# EAGLE board CT_schematic (EAGLE 7.6.0)

Size 100 x 80 mm. Coordinates in mm from the lower left corner, seen from the top.
Outline: 0,0 100,0 100,80 0,80 0,0
Copper layers (1*16): Top 0.035mm / dielectric 1.5mm / Bottom 0.035mm
Design rules "default": minimum track width 10mil, minimum drill 24mil, track to track 8mil, track to pad 8mil, pad to pad 8mil, via to via 8mil, smd to smd 8mil, copper to edge 40mil, drill to drill 8mil, minimum pad ring 10mil, minimum via ring 8mil, stop-mask expansion 4mil, vias tented up to drill 0mil, thermal gap 10mil

## Footprints (pad centres in the part's own frame; a part is rotated, then mirrored left to right if it is on the bottom)
C0603 = smd 0.8 x 0.8: 1 -0.762,0; 2 0.762,0
C0402 = smd 0.5 x 0.5: 1 -0.508,0; 2 0.508,0
C1210 = smd 1.2 x 2.5: 1 -1.524,0; 2 1.524,0
C0805 = smd 1.2 x 1.3: 1 -1.016,0; 2 1.016,0
R0603 = smd 0.8 x 0.8: 1 -0.762,0; 2 0.762,0
EXV-9H = smd 3.505 x 1.676: 1 -2.857,0; 2 2.857,0
L0603 = smd 0.8 x 0.8: 1 -0.762,0; 2 0.762,0
IND25X25CZ = smd 2.489 x 3.429: 1 -2.718,0; 2 2.718,0
PJ-037B_PACKAGE = drill 3.7 square: 1 12,0 | drill 3.2 square: 2 6,0
LQFP144 = smd 0.35 x 1.35: 1 -8.75,-10.625; 2 -8.25,-10.625; 3 -7.75,-10.625; 4 -7.25,-10.625; 5 -6.75,-10.625; 6 -6.25,-10.625; 7 -5.75,-10.625; 8 -5.25,-10.625; 9 -4.75,-10.625; 10 -4.25,-10.625; 11 -3.75,-10.625; 12 -3.25,-10.625; 13 -2.75,-10.62; 14 -2.25,-10.625; 15 -1.75,-10.625; 16 -1.25,-10.625; 17 -0.75,-10.625; 18 -0.25,-10.625; 19 0.25,-10.625; 20 0.75,-10.625; 21 1.25,-10.625; 22 1.75,-10.625; 23 2.25,-10.625; 24 2.75,-10.62; 25 3.25,-10.625; 26 3.75,-10.625; 27 4.25,-10.625; 28 4.75,-10.625; 29 5.25,-10.625; 30 5.75,-10.625; 31 6.25,-10.625; 32 6.75,-10.625; 33 7.25,-10.625; 34 7.75,-10.625; 35 8.25,-10.625; 36 8.75,-10.625; 73 8.75,10.625; 74 8.25,10.625; 75 7.75,10.625; 76 7.25,10.625; 77 6.75,10.625; 78 6.25,10.625; 79 5.75,10.625; 80 5.25,10.625; 81 4.75,10.625; 82 4.25,10.625; 83 3.75,10.625; 84 3.25,10.625; 85 2.75,10.625; 86 2.25,10.625; 87 1.75,10.625; 88 1.25,10.625; 89 0.75,10.625; 90 0.25,10.625; 91 -0.25,10.625; 92 -0.75,10.625; 93 -1.25,10.625; 94 -1.75,10.625; 95 -2.25,10.625; 96 -2.75,10.625; 97 -3.25,10.625; 98 -3.75,10.625; 99 -4.25,10.625; 100 -4.75,10.625; 101 -5.25,10.625; 102 -5.75,10.625; 103 -6.25,10.625; 104 -6.75,10.625; 105 -7.25,10.625; 106 -7.75,10.625; 107 -8.25,10.625; 108 -8.75,10.625 | smd 1.35 x 0.35: 37 10.625,-8.75; 38 10.625,-8.25; 39 10.625,-7.75; 40 10.625,-7.25; 41 10.625,-6.75; 42 10.625,-6.25; 43 10.625,-5.75; 44 10.625,-5.25; 45 10.625,-4.75; 46 10.625,-4.25; 47 10.625,-3.75; 48 10.625,-3.25; 49 10.625,-2.75; 50 10.625,-2.25; 51 10.625,-1.75; 52 10.625,-1.25; 53 10.625,-0.75; 54 10.625,-0.25; 55 10.625,0.25; 56 10.625,0.75; 57 10.625,1.25; 58 10.625,1.75; 59 10.625,2.25; 60 10.625,2.75; 61 10.625,3.25; 62 10.625,3.75; 63 10.625,4.25; 64 10.625,4.75; 65 10.625,5.25; 66 10.625,5.75; 67 10.625,6.25; 68 10.625,6.75; 69 10.625,7.25; 70 10.625,7.75; 71 10.625,8.25; 72 10.625,8.75; 109 -10.625,8.75; 110 -10.625,8.25; 111 -10.625,7.75; 112 -10.625,7.25; 113 -10.625,6.75; 114 -10.625,6.25; 115 -10.625,5.75; 116 -10.625,5.25; 117 -10.625,4.75; 118 -10.625,4.25; 119 -10.625,3.75; 120 -10.625,3.25; 121 -10.625,2.75; 122 -10.625,2.25; 123 -10.625,1.75; 124 -10.625,1.25; 125 -10.625,0.75; 126 -10.625,0.25; 127 -10.625,-0.25; 128 -10.625,-0.75; 129 -10.625,-1.25; 130 -10.625,-1.75; 131 -10.625,-2.25; 132 -10.625,-2.75; 133 -10.625,-3.25; 134 -10.625,-3.75; 135 -10.625,-4.25; 136 -10.625,-4.75; 137 -10.625,-5.25; 138 -10.625,-5.75; 139 -10.625,-6.25; 140 -10.625,-6.75; 141 -10.625,-7.25; 142 -10.625,-7.75; 143 -10.625,-8.25; 144 -10.625,-8.75
LBGA-64 = smd 0.559 x 0.559: A1 -3.5,3.5; A2 -2.5,3.5; A3 -1.5,3.5; A4 -0.5,3.5; A5 0.5,3.5; A6 1.5,3.5; A7 2.5,3.5; A8 3.5,3.5; B1 -3.5,2.5; B2 -2.5,2.5; B3 -1.5,2.5; B4 -0.5,2.5; B5 0.5,2.5; B6 1.5,2.5; B7 2.5,2.5; B8 3.5,2.5; C1 -3.5,1.5; C2 -2.5,1.5; C3 -1.5,1.5; C4 -0.5,1.5; C5 0.5,1.5; C6 1.5,1.5; C7 2.5,1.5; C8 3.5,1.5; D1 -3.5,0.5; D2 -2.5,0.5; D3 -1.5,0.5; D4 -0.5,0.5; D5 0.5,0.5; D6 1.5,0.5; D7 2.5,0.5; D8 3.5,0.5; E1 -3.5,-0.5; E2 -2.5,-0.5; E3 -1.5,-0.5; E4 -0.5,-0.5; E5 0.5,-0.5; E6 1.5,-0.5; E7 2.5,-0.5; E8 3.5,-0.5; F1 -3.5,-1.5; F2 -2.5,-1.5; F3 -1.5,-1.5; F4 -0.5,-1.5; F5 0.5,-1.5; F6 1.5,-1.5; F7 2.5,-1.5; F8 3.5,-1.5; G1 -3.5,-2.5; G2 -2.5,-2.5; G3 -1.5,-2.5; G4 -0.5,-2.5; G5 0.5,-2.5; G6 1.5,-2.5; G7 2.5,-2.5; G8 3.5,-2.5; H1 -3.5,-3.5; H2 -2.5,-3.5; H3 -1.5,-3.5; H4 -0.5,-3.5; H5 0.5,-3.5; H6 1.5,-3.5; H7 2.5,-3.5; H8 3.5,-3.5
QFN-32 = smd 0.6 x 0.3: 1 -2.3,1.75; 2 -2.3,1.25; 3 -2.3,0.75; 4 -2.3,0.25; 5 -2.3,-0.25; 6 -2.3,-0.75; 7 -2.3,-1.25; 8 -2.3,-1.75; 17 2.3,-1.75; 18 2.3,-1.25; 19 2.3,-0.75; 20 2.3,-0.25; 21 2.3,0.25; 22 2.3,0.75; 23 2.3,1.25; 24 2.3,1.75 | smd 0.3 x 0.6: 9 -1.75,-2.3; 10 -1.25,-2.3; 11 -0.75,-2.3; 12 -0.25,-2.3; 13 0.25,-2.3; 14 0.75,-2.3; 15 1.25,-2.3; 16 1.75,-2.3; 25 1.75,2.3; 26 1.25,2.3; 27 0.75,2.3; 28 0.25,2.3; 29 -0.25,2.3; 30 -0.75,2.3; 31 -1.25,2.3; 32 -1.75,2.3 | smd 3.2 x 3.2: EXP 0,0
SJ-43515TS-SMT-TR = smd 2.2 x 3: 1 0.6,-7.4; 4 3.4,-7.4 | smd 3 x 3: 2 12.8,-7.4; 5 17,-3 | smd 2 x 3: 3 5.3,0; 6 2.5,0 | drill 1.8: P$7 4.5,-3.69; P$8 11.54,-3.69
WM-64PC = drill 0.6 pad 1: 1 -1,0.95; 2 -1,-0.95
SSOP-28 = smd 1.5 x 0.4: 1 -3.625,4.225; 2 -3.625,3.575; 3 -3.625,2.925; 4 -3.625,2.275; 5 -3.625,1.625; 6 -3.625,0.975; 7 -3.625,0.325; 8 -3.625,-0.325; 9 -3.625,-0.975; 10 -3.625,-1.625; 11 -3.625,-2.275; 12 -3.625,-2.925; 13 -3.625,-3.575; 14 -3.625,-4.225; 15 3.625,-4.225; 16 3.625,-3.575; 17 3.625,-2.925; 18 3.625,-2.275; 19 3.625,-1.625; 20 3.625,-0.975; 21 3.625,-0.325; 22 3.625,0.325; 23 3.625,0.975; 24 3.625,1.625; 25 3.625,2.275; 26 3.625,2.925; 27 3.625,3.575; 28 3.625,4.225
HTSS-105-01-G-D = drill 1 pad 1.8 square: 1 0,0 | drill 1 pad 1.8: 2 0,2.54; 3 2.54,0; 4 2.54,2.54; 5 5.08,0; 6 5.08,2.54; 7 7.62,0; 8 7.62,2.54; 9 10.16,0; 10 10.16,2.54
ASEK = smd 1.4 x 1: 1 -1.1,-0.8; 2 1.1,-0.8; 3 1.1,0.8; 4 -1.1,0.8
ASFL1 = smd 1.7 x 1.5: 1 -1.27,-1.1; 2 1.27,-1.1; 3 1.27,1.1; 4 -1.27,1.1
WSON-8 = smd 0.3 x 0.6: 1 -0.75,0; 2 0.05,0; 3 0.85,0; 4 1.65,0; 5 1.65,3.8; 6 0.85,3.8; 7 0.05,3.8; 8 -0.75,3.8 | smd 3 x 2.6: PAD 0.45,1.9
IR3899MTR1PBF = smd 0.25 x 0.75: 1 0,0; 2 0.5,0; 3 1,0; 4 1.5,0; 5 2,0; 6 2.5,0; 7 3,0 | smd 0.75 x 0.25: 8 3.425,0.78; 9 3.425,1.28; 10 3.425,1.78; 14 -0.425,1.78; 15 -0.425,1.28; 16 -0.425,0.78 | smd 0.3 x 1.95: 11 3.22,3.63 | smd 1.62 x 2.42: 12 1.786,3.8 | smd 1 x 1.95: 13 0.117,3.63 | smd 2.19 x 1.25: 17 1.51,1.26
SON-6 = smd 0.55 x 0.3: 1 -0.355,0.5 | smd 0.52 x 0.3: 2 -0.37,0; 3 -0.37,-0.5; 4 0.37,-0.5; 5 0.37,0; 6 0.37,0.5
SW_4-1437565-2 = smd 1.4 x 2.1: 1 -2.23,4.55; 2 -2.23,-4.55; 3 2.23,4.55; 4 2.23,-4.55
LGM67K-G1J2-24-Z = smd 0.8 x 1.4: A -2,0; C 0,0
NC7SZ125M5X = smd 1.3 x 0.7: 1 -1.3,0.95; 2 -1.3,0; 3 -1.3,-0.95; 4 1.3,-0.95; 5 1.3,0.95

## Placement (x,y rotation side)
C1  1e-06  [C0603]  -67.31,77.47 0 top  (outside the outline)
C2  1e-07  [C0603]  -71.12,77.47 0 top  (outside the outline)
C3  1e-07  [C0603]  -74.93,77.47 0 top  (outside the outline)
C4  1e-07  [C0603]  -78.74,77.47 0 top  (outside the outline)
C5  1e-07  [C0603]  -82.55,77.47 0 top  (outside the outline)
C6  1e-07  [C0603]  -86.36,77.47 0 top  (outside the outline)
C7  1e-07  [C0603]  -15.24,82.55 0 top  (outside the outline)
C8  1e-07  [C0603]  -19.05,82.55 0 top  (outside the outline)
C9  1e-07  [C0603]  -22.86,82.55 0 top  (outside the outline)
C10  1e-07  [C0603]  -26.67,82.55 0 top  (outside the outline)
C11  1e-07  [C0603]  -30.48,82.55 0 top  (outside the outline)
C12  1e-07  [C0603]  -34.29,82.55 0 top  (outside the outline)
C13  1e-07  [C0603]  -38.1,82.55 0 top  (outside the outline)
C14  4.7e-06  [C0603]  -59.69,77.47 0 top  (outside the outline)
C15  1e-08  [C0603]  -41.91,82.55 0 top  (outside the outline)
C16  1e-06  [C0603]  -45.72,82.55 0 top  (outside the outline)
C17  1e-08  [C0402]  -53.34,87.63 0 top  (outside the outline)
C18  1e-08  [C0402]  -57.15,87.63 0 top  (outside the outline)
C19  1e-06  [C0603]  -49.53,82.55 0 top  (outside the outline)
C20  1e-06  [C0603]  -53.34,82.55 0 top  (outside the outline)
C21  1e-06  [C0603]  -57.15,82.55 0 top  (outside the outline)
C22  1e-06  [C0603]  -60.96,82.55 0 top  (outside the outline)
C23  1e-06  [C0603]  -64.77,82.55 0 top  (outside the outline)
C24  1e-06  [C0603]  -68.58,82.55 0 top  (outside the outline)
C25  1e-06  [C0603]  -72.39,82.55 0 top  (outside the outline)
C26  1e-07  [C0402]  -60.96,87.63 0 top  (outside the outline)
C27  1e-07  [C0402]  -64.77,87.63 0 top  (outside the outline)
C28  1e-07  [C0402]  -68.58,87.63 0 top  (outside the outline)
C29  1e-07  [C0402]  -72.39,87.63 0 top  (outside the outline)
C30  1e-06  [C0603]  -76.2,82.55 0 top  (outside the outline)
C31  1e-07  [C0402]  -76.2,87.63 0 top  (outside the outline)
C32  1e-07  [C0402]  -80.01,87.63 0 top  (outside the outline)
C33  1e-07  [C0402]  -83.82,87.63 0 top  (outside the outline)
C34  1e-07  [C0402]  -87.63,87.63 0 top  (outside the outline)
C35  1e-07  [C0402]  -15.24,92.71 0 top  (outside the outline)
C36  1e-08  [C0402]  -19.05,92.71 0 top  (outside the outline)
C37  1e-08  [C0402]  -22.86,92.71 0 top  (outside the outline)
C38  1e-08  [C0402]  -26.67,92.71 0 top  (outside the outline)
C39  1e-08  [C0402]  -30.48,92.71 0 top  (outside the outline)
C40  1e-05  [C1210]  -80.01,63.5 0 top  (outside the outline)
C41  1e-05  [C0805]  -27.94,71.12 0 top  (outside the outline)
C42  0.0001  [C1210]  -86.36,63.5 0 top  (outside the outline)
C43  2.2e-06  [C0603]  -63.5,77.47 0 top  (outside the outline)
C44  1e-07  [C0402]  -34.29,92.71 0 top  (outside the outline)
C45  1e-07  [C0402]  -38.1,92.71 0 top  (outside the outline)
C46  7.6008333472543e-09  [R0603]  -38.1,71.12 0 top  (outside the outline)
C47  2.591193186564e-07  [R0603]  -46.99,71.12 0 top  (outside the outline)
C50  1e-07  [C0402]  -41.91,92.71 0 top  (outside the outline)
C51  0.0001  [EXV-9H]  -38.1,64.77 0 top  (outside the outline)
C52  0.0001  [EXV-9H]  -49.53,64.77 0 top  (outside the outline)
C53  1e-08  [C0402]  -45.72,92.71 0 top  (outside the outline)
C54  1e-08  [C0402]  -49.53,92.71 0 top  (outside the outline)
F1  240.0  [L0603]  -80.01,82.55 0 top  (outside the outline)
I1  6.8e-07  [IND25X25CZ]  -59.69,64.77 0 top  (outside the outline)
J1  PJ-037B  [PJ-037B_PACKAGE]  -83.82,30.48 0 top  (outside the outline)
R2  1000.0  [R0603]  -83.82,82.55 0 top  (outside the outline)
R4  4700.0  [R0603]  -87.63,82.55 0 top  (outside the outline)
R5  4700.0  [R0603]  -15.24,87.63 0 top  (outside the outline)
R6  10000.0  [R0603]  -87.63,71.12 0 top  (outside the outline)
R7  10000.0  [R0603]  -15.24,77.47 0 top  (outside the outline)
R8  10000.0  [R0603]  -20.32,77.47 0 top  (outside the outline)
R9  10000.0  [R0603]  -25.4,77.47 0 top  (outside the outline)
R10  10000.0  [R0603]  -30.48,77.47 0 top  (outside the outline)
R11  10000.0  [R0603]  -35.56,77.47 0 top  (outside the outline)
R12  1270.0  [R0603]  -19.05,87.63 0 top  (outside the outline)
R13  1270.0  [R0603]  -22.86,87.63 0 top  (outside the outline)
R14  100000.0  [R0603]  -67.31,71.12 0 top  (outside the outline)
R15  100000.0  [R0603]  -72.39,71.12 0 top  (outside the outline)
R16  200.0  [R0603]  -26.67,87.63 0 top  (outside the outline)
R17  1000.0  [R0603]  -30.48,87.63 0 top  (outside the outline)
R18  0.1  [R0603]  -34.29,87.63 0 top  (outside the outline)
R19  4030.2416170974  [R0603]  -54.61,71.12 0 top  (outside the outline)
R20  719.68600305311  [R0603]  -62.23,71.12 0 top  (outside the outline)
R21  68.0  [R0603]  -38.1,87.63 0 top  (outside the outline)
R22  130.0  [R0603]  -41.91,87.63 0 top  (outside the outline)
R23  39000.0  [R0603]  -40.64,77.47 0 top  (outside the outline)
R24  49900.0  [R0603]  -45.72,77.47 0 top  (outside the outline)
R25  5760.0  [R0603]  -45.72,87.63 0 top  (outside the outline)
R26  10000.0  [R0603]  -50.8,77.47 0 top  (outside the outline)
R27  10000.0  [R0603]  -55.88,77.47 0 top  (outside the outline)
R28  9100.0  [R0603]  -49.53,87.63 0 top  (outside the outline)
R29  680000.0  [R0603]  -77.47,71.12 0 top  (outside the outline)
R30  120000.0  [R0603]  -82.55,71.12 0 top  (outside the outline)
U1  STM32F302ZET6  [LQFP144]  -24.13,11.43 0 top  (outside the outline)
U2  mt28ew256aba1HPC-0SIT  [LBGA-64]  -41.91,7.62 0 top  (outside the outline)
U3  SGTL5000XNAA3  [QFN-32]  -67.31,43.18 0 top  (outside the outline)
U4  SJ-43515TS-SMT-TR  [SJ-43515TS-SMT-TR]  -87.63,10.16 0 top  (outside the outline)
U5  SJ-43515TS-SMT-TR  [SJ-43515TS-SMT-TR]  -39.37,33.02 0 top  (outside the outline)
U6  SJ-43515TS-SMT-TR  [SJ-43515TS-SMT-TR]  -67.31,33.02 0 top  (outside the outline)
U7  WM-64PCT  [WM-64PC]  -53.34,43.18 0 top  (outside the outline)
U8  ST3241EBPR  [SSOP-28]  -55.88,7.62 0 top  (outside the outline)
U9  HTSS-105-01-G-D  [HTSS-105-01-G-D]  -27.94,54.61 0 top  (outside the outline)
U10  ASEK-32.768KHz-ECST  [ASEK]  -29.21,64.77 0 top  (outside the outline)
U11  ASFL-24.57MHZ-NCS  [ASFL1]  -66.04,54.61 0 top  (outside the outline)
U12  ASFL1-25MHZ-NCS  [ASFL1]  -82.55,54.61 0 top  (outside the outline)
U13  LP3878SDX-ADJ/NOPB  [WSON-8]  -48.26,53.34 0 top  (outside the outline)
U14  IR3899MTR1PBF  [IR3899MTR1PBF]  -44.45,40.64 0 top  (outside the outline)
U15  TPS3895ADRYR  [SON-6]  -52.07,91.44 0 top  (outside the outline)
U16  4-1437565-2  [SW_4-1437565-2]  -27.94,44.45 0 top  (outside the outline)
U17  Q65110A2395  [LGM67K-G1J2-24-Z]  -68.58,64.77 0 top  (outside the outline)
U18  nc7sz125m5x  [NC7SZ125M5X]  -15.24,71.12 0 top  (outside the outline)
U19  nc7sz125m5x  [NC7SZ125M5X]  -21.59,71.12 0 top  (outside the outline)

## Library data of the parts
C1-C47 C50-C54 F1 I1 J1 R2 R4-R30 U1-U19 = circuit_tree

## Nets
CLK_U1_8: U1.8 U10.3
CLK_U1_23: U1.23 U12.3
CLK_U3_21: U3.21 U11.3
GND: C1.2 C2.2 C3.2 C4.2 C5.2 C6.2 C7.2 C8.2 C9.2 C10.2 C11.2 C12.2 C13.2 C14.2 C15.2 C16.2 C17.2 C18.2 C26.2 C27.2 C28.2 C29.2 C30.2 C31.2 C34.2 C35.2 C36.2 C37.2 C38.2 C39.2 C40.2 C41.2 C43.2 C44.2 C45.2 C50.2 C51.2 C52.2 C53.2 C54.2 J1.2 R2.2 R6.2 R13.2 R17.2 R18.1 R18.2 R20.2 R23.2 R25.2 R28.2 R30.2 U1.16 U1.30 U1.31 U1.38 U1.51 U1.61 U1.71 U1.83 U1.94 U1.107 U1.120 U1.130 U1.143 U2.E8 U2.H2 U2.H7 U3.1 U3.3 U3.7 U3.EXP U5.1 U6.1 U7.2 U8.23 U8.25 U9.9 U10.2 U11.2 U12.2 U13.3 U13.PAD U14.4 U14.11 U14.17 U15.2 U17.C U18.1 U18.3 U19.1 U19.3
NET_U1_25: R5.1 U1.25 U19.4
NET_U1_33: C15.1 C16.1 F1.1 U1.32 U1.33
NET_U1_138: R6.1 U1.138
NET_U1_140: U17.A
NET_U1_142: U16.3 U16.4
NET_U2_B4: R10.1 U2.B4
NET_U2_B5: R4.1 U2.B5 U18.4
NET_U3_10: C29.1 U3.10
NET_U3_29: R12.1 U3.29
NET_U3_31: R13.1 U3.31
NET_U4_1: U3.4 U4.1
NET_U4_2: U3.2 U4.2
NET_U4_5: U3.6 U4.5
NET_U5_2: C20.1 U5.2
NET_U5_5: C19.1 U5.5
NET_U5_11: C20.2
NET_U5_12: C19.2
NET_U6_2: C22.1 C23.1 U6.2
NET_U6_5: C21.1 U6.5
NET_U6_13: C22.2 C23.2
NET_U6_14: C21.2
NET_U7_1: C24.1 C25.1 C30.1 U3.16 U7.1
NET_U7_15: C24.2 C25.2
NET_U8_1: C33.1 U8.1
NET_U8_2: C33.2 U8.2
NET_U8_3: C35.1 U8.3
NET_U8_22: R14.1 U8.22
NET_U8_24: C32.2 U8.24
NET_U8_27: C34.1 U8.27
NET_U8_28: C32.1 U8.28
NET_U9_3: U8.4 U9.3
NET_U9_4: U8.5 U9.4
NET_U9_5: U8.9 U9.5
NET_U9_6: U8.10 U9.6
NET_U13_1: C39.1 U13.1
NET_U13_6: R16.2 R17.1 U13.6
NET_U13_8: R15.1 U13.8
NET_U14_1: C46.1 R19.1 R20.1 R21.1 R22.1 U14.1 U14.8
NET_U14_2: C45.1 U14.2
NET_U14_3: C46.2 C47.1 C47.2 U14.3
NET_U14_5: R23.1 U14.5
NET_U14_10: C43.1 U14.10
NET_U14_12: C42.1 I1.1 U14.12
NET_U14_13: U14.13
NET_U14_14: C42.2 U14.14
NET_U14_15: R24.1 R25.1 U14.15
NET_U14_ATNET_3: I1.2 R19.2
NET_U14_ATNET_4: C47.2 R21.2
NET_U14_ATNET_5: R22.2
NET_U15_1: R27.1 R28.1 U15.1
NET_U15_3: R29.2 R30.1 U15.3
NET_U15_4: R26.1 U15.4 U18.2 U19.2
NET_U16_1: R2.1 U16.1 U16.2
PROC_FMC_A0: U1.10 U2.E2
PROC_FMC_A1: U1.11 U2.D2
PROC_FMC_A2: U1.12 U2.C2
PROC_FMC_A3: U1.13 U2.A2
PROC_FMC_A4: U1.14 U2.B2
PROC_FMC_A5: U1.15 U2.D3
PROC_FMC_A6: U1.50 U2.C3
PROC_FMC_A7: U1.53 U2.A3
PROC_FMC_A8: U1.54 U2.B6
PROC_FMC_A9: U1.55 U2.A6
PROC_FMC_A10: U1.56 U2.C6
PROC_FMC_A11: U1.57 U2.D6
PROC_FMC_A12: U1.87 U2.B7
PROC_FMC_A13: U1.88 U2.A7
PROC_FMC_A14: U1.89 U2.C7
PROC_FMC_A15: U1.90 U2.D7
PROC_FMC_A16: U1.80 U2.E7
PROC_FMC_A17: U1.81 U2.B3
PROC_FMC_A18: U1.82 U2.C4
PROC_FMC_A19: U1.2 U2.D5
PROC_FMC_A20: U1.3 U2.D4
PROC_FMC_A21: U1.4 U2.C5
PROC_FMC_A22: U1.5 U2.B8
PROC_FMC_A23: U1.1 U2.C8
PROC_FMC_D0: U1.85 U2.E3
PROC_FMC_D1: U1.86 U2.H3
PROC_FMC_D2: U1.114 U2.E4
PROC_FMC_D3: U1.115 U2.H4
PROC_FMC_D4: U1.58 U2.H5
PROC_FMC_D5: U1.59 U2.E5
PROC_FMC_D6: U1.60 U2.H6
PROC_FMC_D7: U1.63 U2.E6
PROC_FMC_D8: U1.64 U2.F3
PROC_FMC_D9: U1.65 U2.G3
PROC_FMC_D10: U1.66 U2.F4
PROC_FMC_D11: U1.67 U2.G4
PROC_FMC_D12: U1.68 U2.F5
PROC_FMC_D13: U1.77 U2.G6
PROC_FMC_D14: U1.78 U2.F6
PROC_FMC_D15: U1.79 U2.G7
PROC_FMC_NBL0: R11.1 U1.141 U2.F7
PROC_FMC_NE2: R7.1 U1.124 U2.F2
PROC_FMC_NOE: R8.1 U1.118 U2.G2
PROC_FMC_NWAIT: U1.122 U2.A4
PROC_FMC_NWE: R9.1 U1.119 U2.A5
PROC_I2S2_CK: U1.24 U3.24
PROC_I2S2_EXT_SD: U1.75 U3.25
PROC_I2S2_SD: U1.76 U3.26
PROC_I2S2_WS: U1.73 U3.23
PROC_UART4_RX: U1.112 U8.19
PROC_UART4_TX: U1.111 U8.14
VCC_S1_15V6: C40.1 C44.1 C51.1 C52.1 J1.1 R15.2 R24.2 U13.4 U14.9
VCC_TIER1_1V2: C26.1 C41.1 R16.1 U3.30 U13.5
VCC_TIER1_3V3: C1.1 C2.1 C3.1 C4.1 C5.1 C6.1 C7.1 C8.1 C9.1 C10.1 C11.1 C12.1 C13.1 C14.1 C17.1 C18.1 C27.1 C28.1 C31.1 C36.1 C37.1 C38.1 C50.1 C53.1 C54.1 F1.2 I1.2 R4.2 R5.2 R7.2 R8.2 R9.2 R10.2 R11.2 R12.2 R14.2 R19.2 R26.2 R27.2 R29.1 U1.6 U1.17 U1.39 U1.52 U1.62 U1.72 U1.84 U1.95 U1.108 U1.121 U1.131 U1.144 U2.D8 U2.F1 U2.G5 U3.5 U3.20 U8.26 U10.4 U11.4 U12.4 U15.6 U18.5 U19.5

## Tracks (layer width: path | path; a pad name or v marks a point on that pad's centre or on a via)
CLK_U1_8  (1 unrouted)
CLK_U1_23  (1 unrouted)
CLK_U3_21  (1 unrouted)
GND  (91 unrouted)
NET_U1_25  (2 unrouted)
NET_U1_33  (4 unrouted)
NET_U1_138  (1 unrouted)
NET_U1_142  (1 unrouted)
NET_U2_B4  (1 unrouted)
NET_U2_B5  (2 unrouted)
NET_U3_10  (1 unrouted)
NET_U3_29  (1 unrouted)
NET_U3_31  (1 unrouted)
NET_U4_1  (1 unrouted)
NET_U4_2  (1 unrouted)
NET_U4_5  (1 unrouted)
NET_U5_2  (1 unrouted)
NET_U5_5  (1 unrouted)
NET_U6_2  (2 unrouted)
NET_U6_5  (1 unrouted)
NET_U6_13  (1 unrouted)
NET_U7_1  (4 unrouted)
NET_U7_15  (1 unrouted)
NET_U8_1  (1 unrouted)
NET_U8_2  (1 unrouted)
NET_U8_3  (1 unrouted)
NET_U8_22  (1 unrouted)
NET_U8_24  (1 unrouted)
NET_U8_27  (1 unrouted)
NET_U8_28  (1 unrouted)
NET_U9_3  (1 unrouted)
NET_U9_4  (1 unrouted)
NET_U9_5  (1 unrouted)
NET_U9_6  (1 unrouted)
NET_U13_1  (1 unrouted)
NET_U13_6  (2 unrouted)
NET_U13_8  (1 unrouted)
NET_U14_1  (6 unrouted)
NET_U14_2  (1 unrouted)
NET_U14_3  (3 unrouted)
NET_U14_5  (1 unrouted)
NET_U14_10  (1 unrouted)
NET_U14_12  (2 unrouted)
NET_U14_14  (1 unrouted)
NET_U14_15  (2 unrouted)
NET_U14_ATNET_3  (1 unrouted)
NET_U14_ATNET_4  (1 unrouted)
NET_U15_1  (2 unrouted)
NET_U15_3  (2 unrouted)
NET_U15_4  (3 unrouted)
NET_U16_1  (2 unrouted)
PROC_FMC_A0  (1 unrouted)
PROC_FMC_A1  (1 unrouted)
PROC_FMC_A2  (1 unrouted)
PROC_FMC_A3  (1 unrouted)
PROC_FMC_A4  (1 unrouted)
PROC_FMC_A5  (1 unrouted)
PROC_FMC_A6  (1 unrouted)
PROC_FMC_A7  (1 unrouted)
PROC_FMC_A8  (1 unrouted)
PROC_FMC_A9  (1 unrouted)
PROC_FMC_A10  (1 unrouted)
PROC_FMC_A11  (1 unrouted)
PROC_FMC_A12  (1 unrouted)
PROC_FMC_A13  (1 unrouted)
PROC_FMC_A14  (1 unrouted)
PROC_FMC_A15  (1 unrouted)
PROC_FMC_A16  (1 unrouted)
PROC_FMC_A17  (1 unrouted)
PROC_FMC_A18  (1 unrouted)
PROC_FMC_A19  (1 unrouted)
PROC_FMC_A20  (1 unrouted)
PROC_FMC_A21  (1 unrouted)
PROC_FMC_A22  (1 unrouted)
PROC_FMC_A23  (1 unrouted)
PROC_FMC_D0  (1 unrouted)
PROC_FMC_D1  (1 unrouted)
PROC_FMC_D2  (1 unrouted)
PROC_FMC_D3  (1 unrouted)
PROC_FMC_D4  (1 unrouted)
PROC_FMC_D5  (1 unrouted)
PROC_FMC_D6  (1 unrouted)
PROC_FMC_D7  (1 unrouted)
PROC_FMC_D8  (1 unrouted)
PROC_FMC_D9  (1 unrouted)
PROC_FMC_D10  (1 unrouted)
PROC_FMC_D11  (1 unrouted)
PROC_FMC_D12  (1 unrouted)
PROC_FMC_D13  (1 unrouted)
PROC_FMC_D14  (1 unrouted)
PROC_FMC_D15  (1 unrouted)
PROC_FMC_NBL0  (2 unrouted)
PROC_FMC_NE2  (2 unrouted)
PROC_FMC_NOE  (2 unrouted)
PROC_FMC_NWAIT  (1 unrouted)
PROC_FMC_NWE  (2 unrouted)
PROC_I2S2_CK  (1 unrouted)
PROC_I2S2_EXT_SD  (1 unrouted)
PROC_I2S2_SD  (1 unrouted)
PROC_I2S2_WS  (1 unrouted)
PROC_UART4_RX  (1 unrouted)
PROC_UART4_TX  (1 unrouted)
VCC_S1_15V6  (8 unrouted)
VCC_TIER1_1V2  (4 unrouted)
VCC_TIER1_3V3  (63 unrouted)